# Altium PCB mc_spine_con.PcbDoc
Units mm, origin at the board's own origin, x right, y up, seen from the top; angles counter-clockwise.
Board outline 56 x 85.01 mm, 2 copper layers (Top, Bottom); 14 components, 17 nets, 73 pads, 0 vias.
Unrouted connection lines stored in the file: 1.
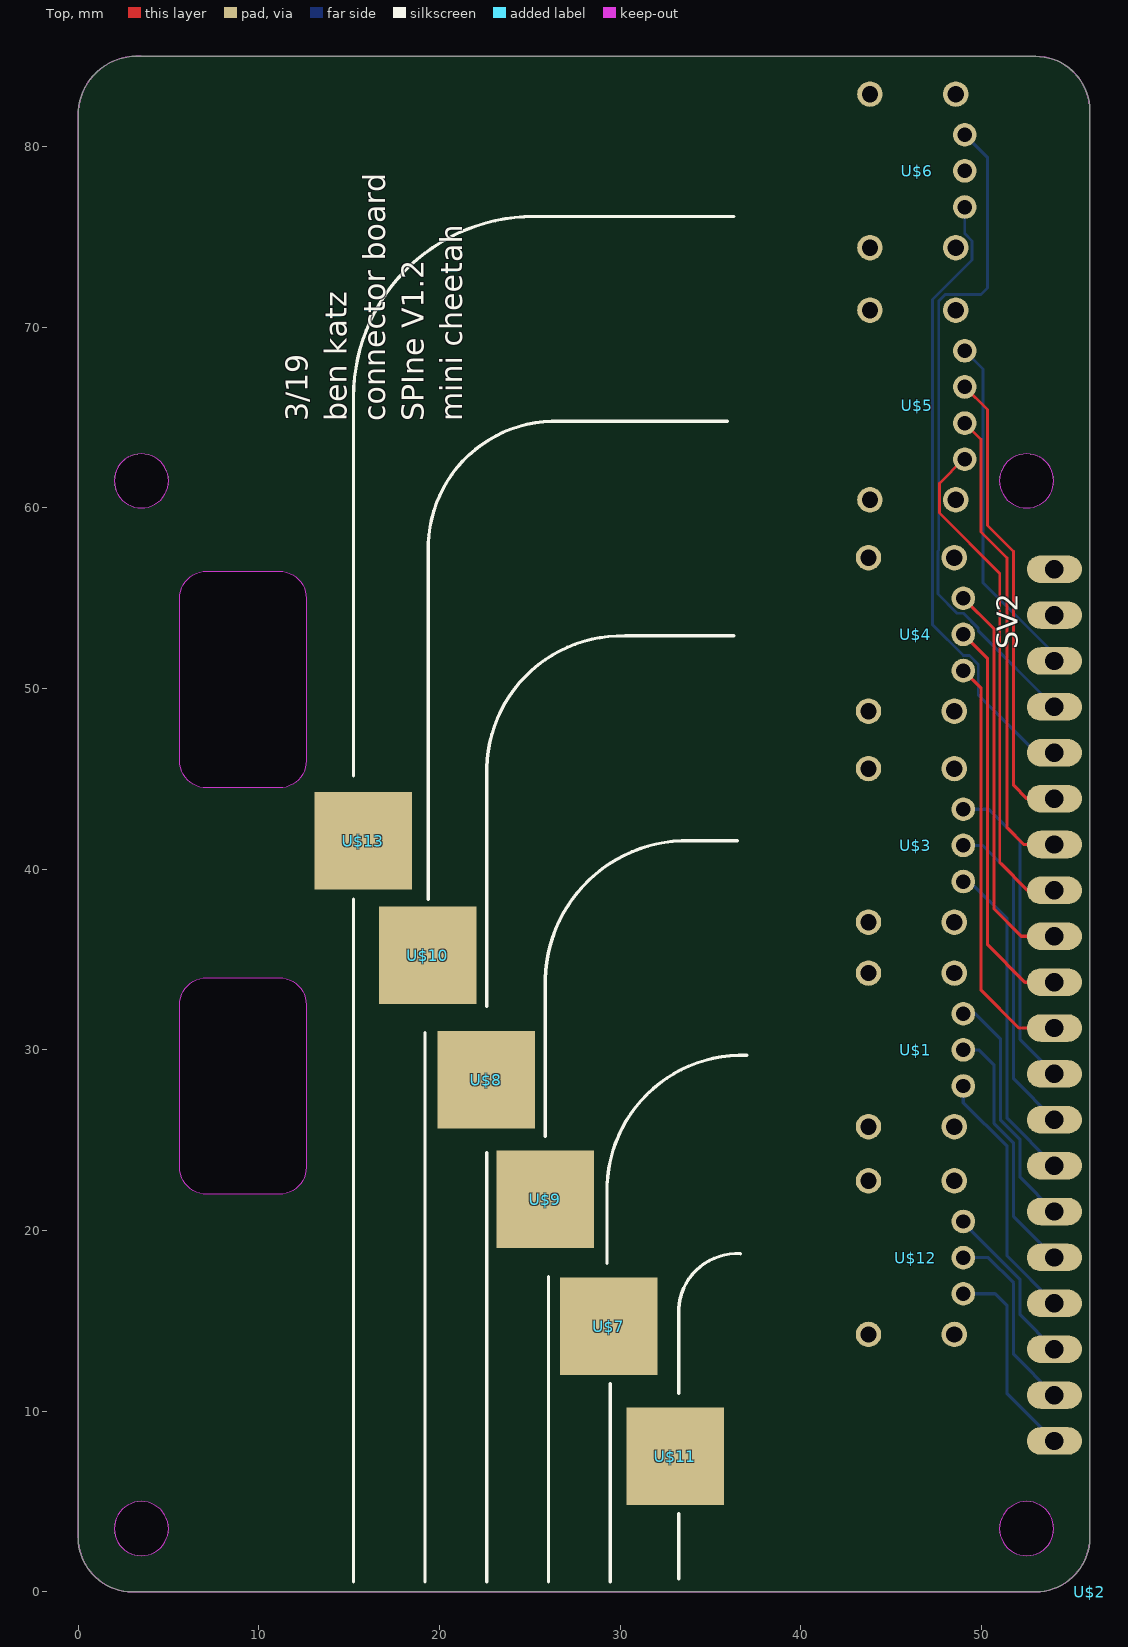
[diagram p0: Top view]
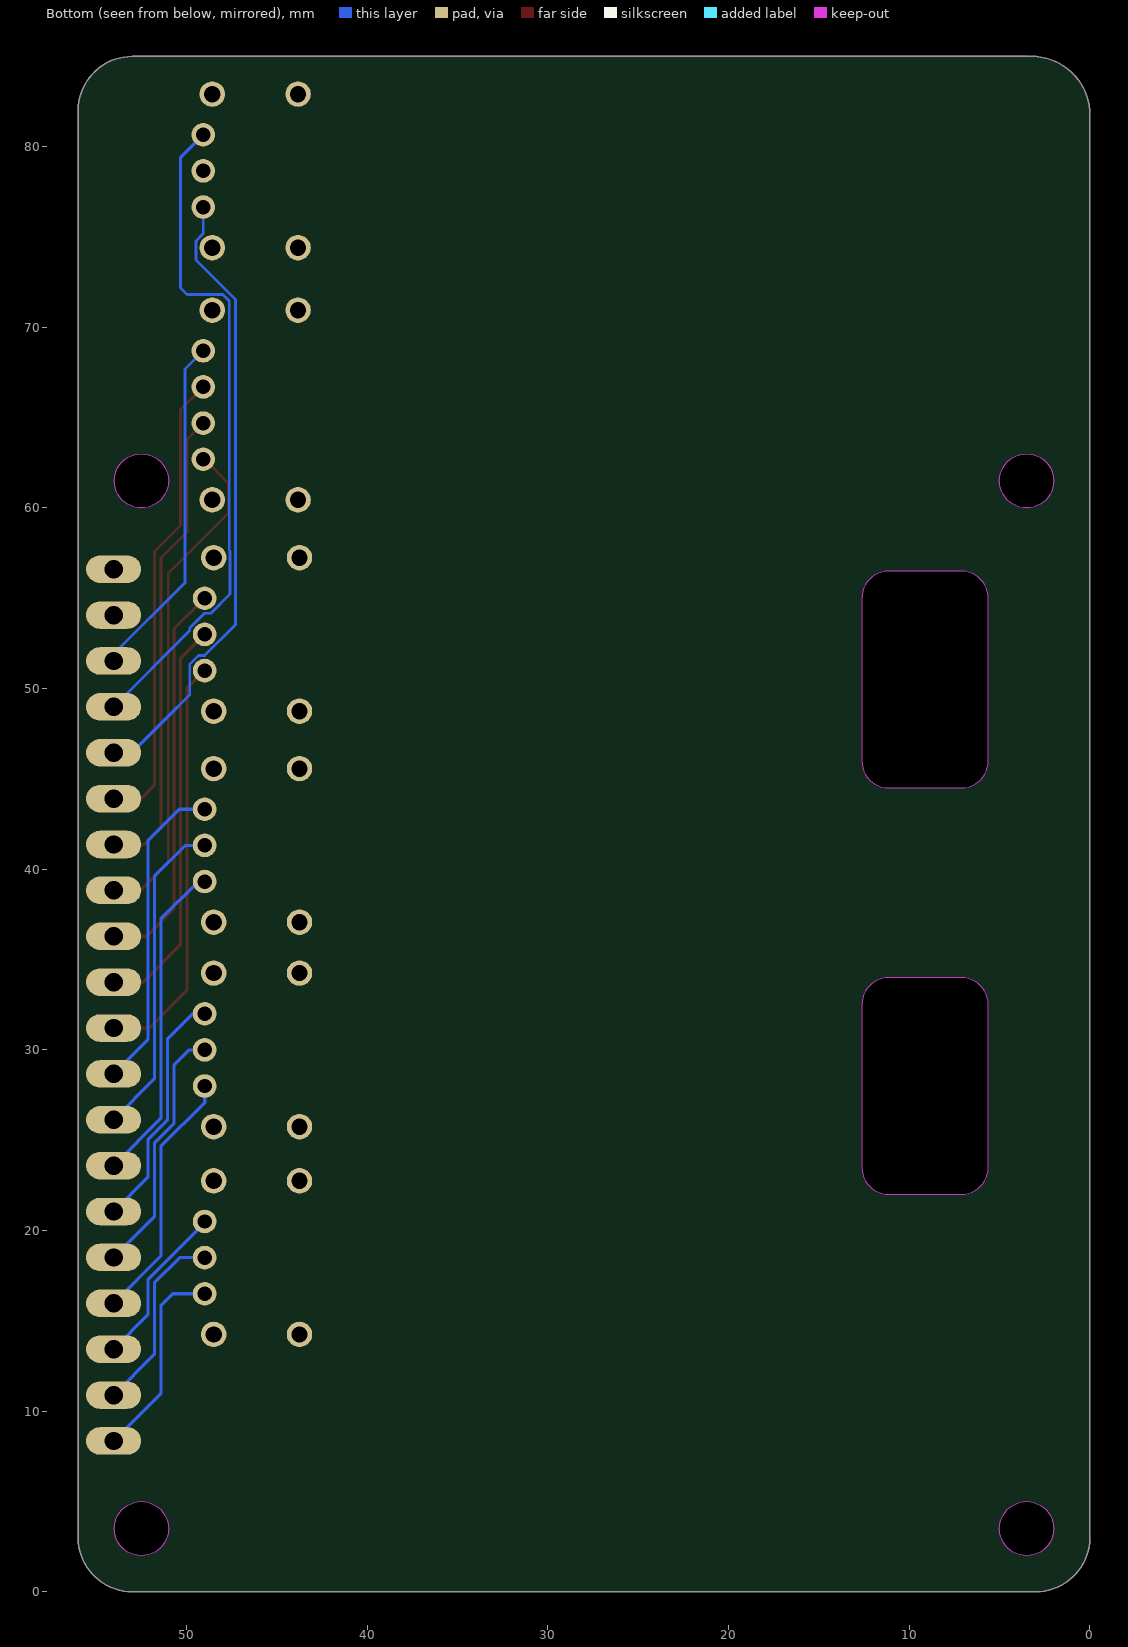
[diagram p1: Bottom view, seen from below]

## Layer stack, top to bottom
Top Solder: solder mask 0.0102, Solder Resist, Dk 3.5
Top: signal copper 0.035
Dielectric 1: dielectric 0.32, FR-4, Dk 4.8
Bottom: signal copper 0.035
Bottom Solder: solder mask 0.0102, Solder Resist, Dk 3.5

## Board outline
56,82 56,3 cw(c53,3) 53,0 3,0 cw(c3,3) 0,3 0,82 cw(c3.25,81.75) 3.5,85 53,85 cw(c53,82)
cut-out: 7.12,34 11.12,34 cw(c11.12,32.5) 12.62,32.5 12.62,23.5 cw(c11.12,23.5) 11.12,22 7.12,22 cw(c7.12,23.5) 5.62,23.5 5.62,32.5 cw(c7.12,32.5)
cut-out: 5.62,46 5.62,55 cw(c7.12,55) 7.12,56.5 11.12,56.5 cw(c11.12,55) 12.62,55 12.62,46 cw(c11.12,46) 11.12,44.5 7.12,44.5 cw(c7.12,46)
cut-out: 52.5,60 ccw(c52.5,61.5) 54,61.5 ccw(c52.5,61.5) 52.5,63 ccw(c52.5,61.5) 51,61.5 ccw(c52.5,61.5)
cut-out: 52.5,2 ccw(c52.5,3.5) 54,3.5 ccw(c52.5,3.5) 52.5,5 ccw(c52.5,3.5) 51,3.5 ccw(c52.5,3.5)
cut-out: 3.5,2 ccw(c3.5,3.5) 5,3.5 ccw(c3.5,3.5) 3.5,5 ccw(c3.5,3.5) 2,3.5 ccw(c3.5,3.5)
cut-out: 3.5,60 ccw(c3.5,61.5) 5,61.5 ccw(c3.5,61.5) 3.5,63 ccw(c3.5,61.5) 2,61.5 ccw(c3.5,61.5)

## Design rules (kind name [scope] priority, off if disabled: settings)
BoardOutlineClearance mdCopperDimension [All] p1: gap=0.254 ignorepadtopadclearanceinfootprint=FALSE except(0: Arc-SplitContinuation Track-SplitContinuation SMDPad-SplitContinuation THPad-SplitContinuation Via-SplitContinuation Fill-SplitContinuation Poly-SplitContinuation Region-SplitContinuation Text-SplitContinuation; 1.016: Poly-OutlineEdge Poly-CavityEdge Poly-CutoutEdge Poly-SplitBarrior)
Clearance "Clearance (Same Net)" [All] p1: gap=0.152 ignorepadtopadclearanceinfootprint=FALSE
Clearance [All] p2: gap=0.152 ignorepadtopadclearanceinfootprint=FALSE
HoleSize [All] p1: absolutevalues=TRUE maxlimit=2540 minlimit=0.3 maxpercent=80.000 minpercent=20.000
HoleToHoleClearance mdDrill [All] p1: gap=0.152 allowstackedmicrovias=TRUE
MinimumSolderMaskSliver [All] p1 off: minsoldermaskwidth=0.254
PasteMaskExpansion mlMinCreamFrame [All] p1: expansion=0
PolygonConnect ThermalVias [IsVia] p1: connectstyle=Direct reliefconductorwidth=0.254 reliefentries=4 polygonreliefangle="90 Angle" airgapwidth=0.254
PolygonConnect [All] p2: connectstyle=Relief reliefconductorwidth=0.254 reliefentries=4 polygonreliefangle="90 Angle" airgapwidth=0.254
RoutingVias [All] p1: holewidth=0.3 width=0.605 viastyle="Through Hole" minholewidth=0.3 minwidth=0.605 maxholewidth=2.54 maxwidth=2.54
SolderMaskExpansion mlMinStopFrame [All] p1: expansion=0.102 istentingtop=FALSE
Width [All] p1: maxlimit=0.254 minlimit=0.152 preferedwidth=0.152
26 further rules are at their usual default settings.

## Components (designator, comment, footprint, x,y, rotation, side; value= is the part's Value field where it differs from the comment)
SV2 "" MA20-1L 54.04,32.48 r90 top
U$1 "" M80-8430342 49,30 r270 top
U$2 "" UP_BOARD_NOPINS 56,0 r90 top
U$3 "" M80-8430342 49,41.32 r270 top
U$4 "" M80-8430342 49,53 r270 top
U$5 "" M80-8430442 49.08,65.7 r270 top
U$6 "" M80-8430342 49.08,78.66 r270 top
U$7 "" S8111-46R 29.36,14.7 r0 top
U$8 "" S8111-46R 22.6,28.34 r0 top
U$9 "" S8111-46R 25.85,21.74 r0 top
U$10 "" S8111-46R 19.36,35.24 r0 top
U$11 "" S8111-46R 33.06,7.51 r0 top
U$12 "" M80-8430342 49,18.5 r270 top
U$13 "" S8111-46R 15.78,41.58 r0 top

## Footprints (in the part's own frame and the unit in brackets; to place one, negate y for a bottom-side part, rotate by r counter-clockwise, add the part's x,y. Pads: shape width x height; smd on the part's side, far side on the other; paste and mask are expansions set on the pad)
M80-8430342 [mil] "M80-8430342"
  round 51.5 hole 31.5: 1(78.74,0) 2(0,0) 3(-78.74,0)
  round 55.43 hole 35.43: P$4(167.32,-19.69) P$5(-167.32,-19.69) P$6(-167.32,-206.69) P$7(167.32,-206.69)
  body extent -195,-235 195,26, height 50
M80-8430442 [mil] "M80-8430442"
  round 51.5 hole 31.5: 1(118.11,0) 2(39.37,0) 3(-39.37,0) 4(-118.11,0)
  round 55.43 hole 35.43: P$4(206.69,-19.69) P$5(-206.69,-19.69) P$6(-206.69,-206.69) P$7(206.69,-206.69)
  body extent -235,-235 235,26, height 50
MA20-1L [mil] "MA20-1L"
  oval 60x120 hole 40: 1(950,0) 2(850,0) 3(750,0) 4(650,0) 5(550,0) 6(450,0) 7(350,0) 8(250,0) 9(150,0) 10(50,0) 11(-50,0) 12(-150,0) 13(-250,0) 14(-350,0) 15(-450,0) 16(-550,0) 17(-650,0) 18(-750,0) 19(-850,0) 20(-950,0)
  body extent -980,-60 980,60, height 150
S8111-46R [mm] "S8111-46R"
  rect 5.4x5.4 smd: P$1(0,0)
  body extent -2.7,-2.7 2.7,2.7, height 1.27
UP_BOARD_NOPINS [mm] "UP_BOARD_NOPINS"

## Part data
SV2: library part MA20-1L, PackageName=MA20-1L
U$1 U$3 U$4 U$6 U$12: library part M80-8430342, PackageName=M80-8430342
U$2: library part UP_BOARD_NOPINS, PackageName=UP_BOARD_NOPINS
U$5: library part M80-8430442, PackageName=M80-8430442
U$7 U$8 U$9 U$10 U$11 U$13: library part S8111-46R, PackageName=S8111-46R

## Free pads (board coordinates)
  round 3 hole 3 unplated: MH1(3.5,3.5) MH2(3.5,61.5) MH3(52.5,61.5) MH4(52.5,3.5)

## Nets (pads, with @x,y where several pads share a name; then routed paths per layer and width w, separated by ;. In a path a pad name is that pad's centre, name@x,y a point inside that pad or via, vN(x,y) a via of type N, cw(c..) or ccw(c..) an arc to the next point about the centre after c; other vN are vias at no path point)
CAN1_GND: SV2.18 U$12.3 | length 9.2
  Bottom w0.18: U$12.3 49,20.42 52.14,17.28 52.14,15.33 SV2.18
CAN1_H: SV2.19 U$12.2 | length 10.5
  Bottom w0.18: U$12.2 50.38,18.5 51.78,17.1 51.78,13.15 SV2.19
CAN1_L: SV2.20 U$12.1 | length 11.3
  Bottom w0.18: U$12.1 50.76,16.5 51.42,15.84 51.42,10.97 SV2.20
CAN2_GND: SV2.15 U$1.3 | length 13.4
  Bottom w0.18: U$1.3 49.66,32 51.06,30.6 51.06,26.1 52.14,25.02 52.14,22.95 SV2.15
CAN2_H: SV2.16 U$1.2 | length 14.1
  Bottom w0.18: U$1.2 49.86,30 50.7,29.16 50.7,25.92 51.78,24.84 51.78,20.77 SV2.16
CAN2_L: SV2.17 U$1.1 | length 14.1
  Bottom w0.18: U$1.1 49,27.08 51.42,24.66 51.42,18.59 SV2.17
CAN3_GND: SV2.12 U$3.3 | length 17.6
  Bottom w0.18: U$3.3 50.4,43.32 52.14,41.58 52.14,30.57 SV2.12
CAN3_H: SV2.13 U$3.2 | length 17.9
  Bottom w0.18: U$3.2 50.06,41.32 51.78,39.6 51.78,28.39 SV2.13
CAN3_L: SV2.14 U$3.1 | length 18
  Bottom w0.18: U$3.1 49.36,39.32 51.42,37.26 51.42,26.21 SV2.14
CAN4_GND: SV2.9 U$4.3 | length 21.9
  Top w0.18: U$4.3 50.7,53.3 50.7,37.8 52.21,36.29 SV2.9
CAN4_H: SV2.10 U$4.2 | length 22.3
  Top w0.18: U$4.2 50.34,51.66 50.34,35.82 52.41,33.75 SV2.10
CAN4_L: SV2.11 U$4.1 | length 23
  Top w0.18: U$4.1 49.98,50.02 49.98,33.3 52.07,31.21 SV2.11
ESTOP: SV2.4 U$6.3 | length 37.4
  Bottom w0.152: 50.34,79.4 50.34,72.18 49.98,71.82 48,71.82 47.64,71.46 47.64,57.668 47.596,57.624 47.596,55.232 48.657,54.171 49,54.171 49.828,53.343 49.828,53.201 SV2.4
  Bottom w0.18: U$6.3 50.34,79.4
GND: SV2.5 SV2.8 U$5.1 U$6.1 | length 62.9
  Top w0.152: U$5.1 49.012,62.7 47.676,61.364 47.676,59.724 51.018,56.381 51.018,40.361 51.06,40.32
  Top w0.18: 51.06,40.32 52.55,38.83 SV2.8
  Bottom w0.152: U$6.1 49.08,75.188 49.484,74.784 49.484,73.735 47.291,71.543 47.291,53.537 48.999,51.829 49.343,51.829 49.828,51.343 49.828,49.651 50.52,48.96
  Bottom w0.18: 50.52,48.96 53.03,46.45 SV2.5
L_5V: SV2.7 U$5.2 | length 26.4
  Top w0.152: U$5.2 49.98,63.8 49.98,58.68 51.42,57.24 51.42,42.3
  Top w0.18: 51.42,42.3 52.35,41.37 SV2.7
RX: SV2.3 U$5.4 | length 19.2
  Bottom w0.152: U$5.4 50.088,67.692 50.088,55.859 54.04,51.907 SV2.3
SBUS_IN: SV2.6 U$5.3 | length 25.7
  Top w0.152: U$5.3 50.34,65.44 50.34,59.04 51.78,57.6 51.78,44.64
  Top w0.18: 51.78,44.64 52.51,43.91 SV2.6
pads on no net: SV2.1 SV2.2 U$1.P$4 U$1.P$5 U$1.P$6 U$1.P$7 U$3.P$4 U$3.P$5 U$3.P$6 U$3.P$7 U$4.P$4 U$4.P$5 U$4.P$6 U$4.P$7 U$5.P$4 U$5.P$5 U$5.P$6 U$5.P$7 U$6.2 U$6.P$4 U$6.P$5 U$6.P$6 U$6.P$7 U$7.P$1 U$8.P$1 U$9.P$1 U$10.P$1 U$11.P$1 U$12.P$4 U$12.P$5 U$12.P$6 U$12.P$7 U$13.P$1

## Keep-outs
Keep-Out Layer:
  the board outline again, w0

## Silkscreen, mask and mechanical layers (free items; w line width, h text height)
Top Overlay:
  lines w0.18: 15.24,0.54 15.24,38.34 ; 15.24,45.18 15.24,66.14 cw(c25.24,66.14) 25.24,76.14 36.3,76.14 ; 19.2,0.54 19.2,30.96 ; 19.38,38.34 19.38,58.04 cw(c26.41,57.77) 26.68,64.8 35.94,64.8 ; 22.62,0.54 22.62,24.3 ; 22.62,32.4 22.62,45.62 cw(c30.1,45.44) 30.28,52.92 36.3,52.92 ; 25.86,25.2 25.86,33.92 cw(c33.7,33.74) 33.88,41.58 36.48,41.58 ; 26.04,0.54 26.04,17.46 ; 29.28,18.18 29.28,22.5 cw(c36.75,22.23) 37.02,29.7 ; 29.46,0.54 29.46,11.52 ; 33.24,0.72 33.24,4.32 ; 33.24,10.98 33.24,15.66 cw(c36.48,15.48) 36.66,18.72
  text "3/19" at 12.72,64.8 h1.21 r90
  text "ben katz" at 14.853,64.8 h1.21 r90
  text "connector board" at 16.987,64.8 h1.21 r90
  text "SPIne V1.2" at 19.121,64.8 h1.21 r90
  text "mini cheetah" at 21.254,64.8 h1.21 r90
Dimension:
  lines w0: 5.62,23.5 ccw(c7.12,23.5) 7.12,22 11.12,22 ccw(c11.12,23.5) 12.62,23.5 12.62,32.5 ccw(c11.12,32.5) 11.12,34 7.12,34 ccw(c7.12,32.5) 5.62,32.5 5.62,23.5 ; 5.62,46 ccw(c7.12,46) 7.12,44.5 11.12,44.5 ccw(c11.12,46) 12.62,46 12.62,55 ccw(c11.12,55) 11.12,56.5 7.12,56.5 ccw(c7.12,55) 5.62,55 5.62,46
  text "ESTOP" at 28.769,77.329 h1.51
  text "SBUS" at 30.1,65.449 h1.51
  text "LEG 1" at 28.56,53.46 h1.51
  text "LEG 2" at 29.59,42.369 h1.51
  text "LEG 3" at 30.289,30.529 h1.51
  text "LEG 4" at 30.27,19.549 h1.51
Unrouted:
  lines w0: 47.291,53.537 51.018,56.381

## Text inside footprints (layer, text, board x,y; h text height)
SV2: tPlace "10" at 56.961,32.861 h1.97 r90; tPlace "20" at 56.961,7.334 h1.97 r90; tPlace "1" at 56.961,56.229 h1.97 r90